# Altium PCB BMS Slave.PcbDoc
Units mil, origin at the board's own origin, x right, y up, seen from the top; angles counter-clockwise.
Board outline 4845 x 2615 mil, 2 copper layers (Top Layer, Bottom Layer); 134 components, 105 nets, 356 pads, 46 vias.
Unrouted connection lines stored in the file: 4.
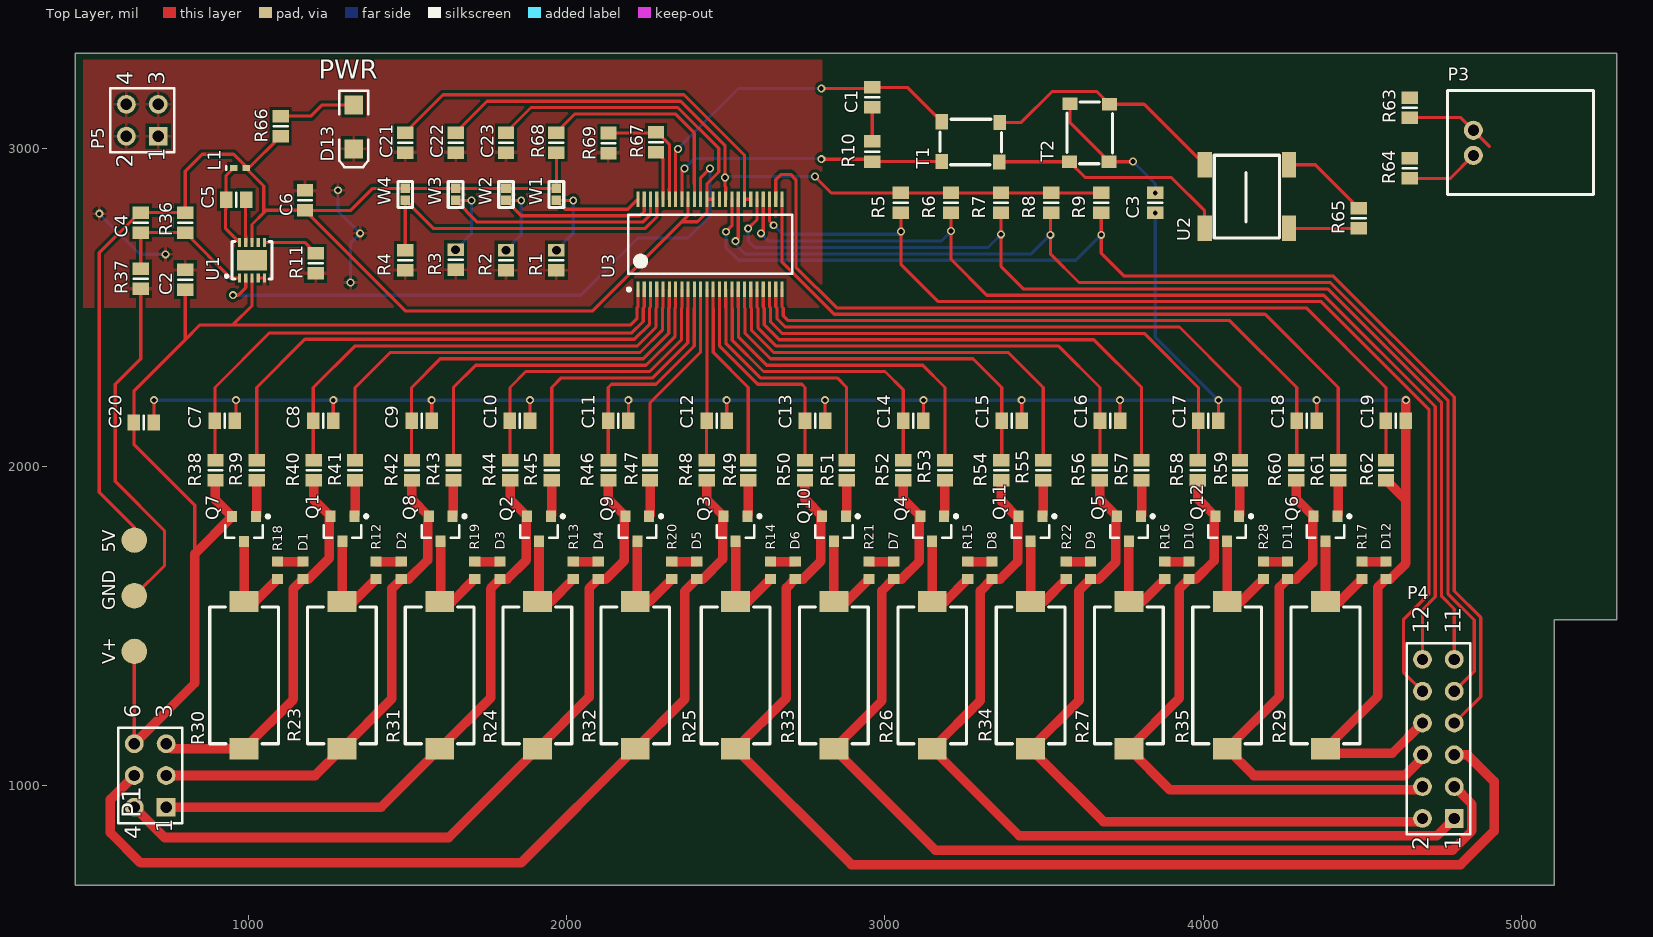
[diagram p0: Top Layer view]
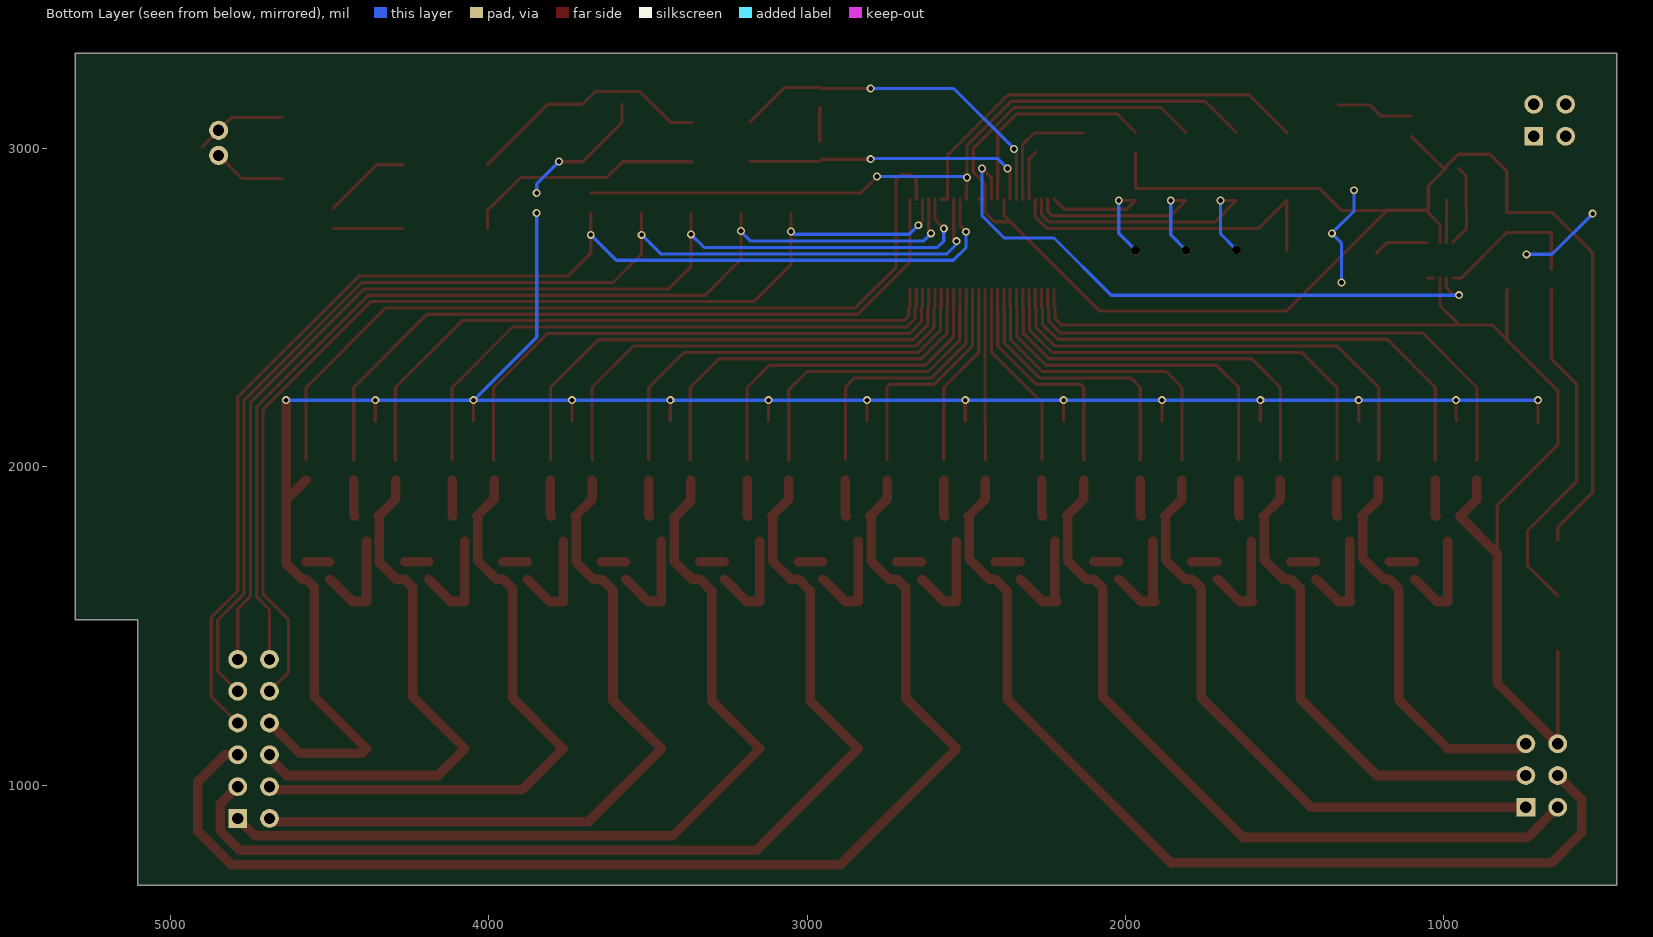
[diagram p1: Bottom Layer view, seen from below]

## Layer stack, top to bottom
Top Solder: solder mask 0.4, Solder Resist, Dk 3.5
Top Layer: signal copper 1.4
Dielectric 1: dielectric 12.6, FR-4, Dk 4.8
Bottom Layer: signal copper 1.4
Bottom Solder: solder mask 0.4, Solder Resist, Dk 3.5

## Board outline
455,685 455,3300 5300,3300 5300,1520 5105,1520 5105,685
cut-out: 455,685

## Design rules (kind name [scope] priority, off if disabled: settings)
Clearance [All] p1: gap=10 ignorepadtopadclearanceinfootprint=FALSE except(0: Arc-Hole Track-Hole SMDPad-Hole THPad-Hole Via-Hole Fill-Hole Poly-Hole Region-Hole Text-Hole)
PolygonConnect [All] p1: connectstyle=Relief reliefconductorwidth=10 reliefentries=4 polygonreliefangle="90 Angle" airgapwidth=10
RoutingVias [All] p1: holewidth=28 width=50 viastyle="Through Hole" minholewidth=28 minwidth=50 maxholewidth=28 maxwidth=50
SolderMaskExpansion [All] p1: expansion=4
Width [All] p1: maxlimit=30 minlimit=10 preferedwidth=10 bottomlayer_maxwidth=10 minimp=50.000000 maximp=50.000000 favimp=50.000000
30 further rules are at their usual default settings.

## Components (designator, comment, footprint, x,y, rotation, side; value= is the part's Value field where it differs from the comment)
5V "EXPOSED SOLDER PAD" "TEST PAD" 640,1770 r0 top
C1 "Cap" 6-0805_L 2960,3161.81 r90 top value=15pF
C2 "Cap" 6-0805_L 800,2588.5 r270 top value=2.2uF
C3 "Cap" 6-0805_L 3850,2830 r270 top value=10nF
C4 "Cap" 6-0805_L 660,2768.5 r90 top value=22pF
C5 "Cap" 6-0805_L 960,2840 r0 top value=2.2uF
C6 "Cap" 6-0805_L 1176.42,2837.99 r270 top value=2.2uF
C7 "Cap" 6-0805_L 925,2145 r180 top value=100pF
C8 "Cap" 6-0805_L 1234.18,2145 r180 top value=100pF
C9 "Cap" 6-0805_L 1543.35,2145 r180 top value=100pF
C10 "Cap" 6-0805_L 1852.53,2145 r180 top value=100pF
C11 "Cap" 6-0805_L 2161.71,2145 r180 top value=100pF
C12 "Cap" 6-0805_L 2470.88,2145 r180 top value=100pF
C13 "Cap" 6-0805_L 2780.06,2145 r180 top value=100pF
C14 "Cap" 6-0805_L 3089.24,2145 r180 top value=100pF
C15 "Cap" 6-0805_L 3398.41,2145 r180 top value=100pF
C16 "Cap" 6-0805_L 3707.59,2145 r180 top value=100pF
C17 "Cap" 6-0805_L 4016.77,2145 r180 top value=100pF
C18 "Cap" 6-0805_L 4325.94,2145 r180 top value=100pF
C19 "Cap" 6-0805_L 4606.5,2145 r180 top value=100pF
C20 "Cap" 6-0805_L 670,2140 r180 top value=100nF
C21 "Cap" 6-0805_L 1491.86,3020 r90 top value=100pF
C22 "Cap" 6-0805_L 1650.19,3020 r270 top value=1uF
C23 "Cap" 6-0805_L 1808.52,3020 r90 top value=1uF
D1 "LED2" 1608[0603] 1170,1675 r270 top
D2 "LED2" 1608[0603] 1479.55,1675 r270 top
D3 "LED2" 1608[0603] 1790,1675 r270 top
D4 "LED2" 1608[0603] 2098.64,1675 r270 top
D5 "LED2" 1608[0603] 2408.18,1675 r270 top
D6 "LED2" 1608[0603] 2717.73,1675 r270 top
D7 "LED2" 1608[0603] 3027.27,1675 r270 top
D8 "LED2" 1608[0603] 3336.82,1675 r270 top
D9 "LED2" 1608[0603] 3646.36,1675 r270 top
D10 "LED2" 1608[0603] 3955.91,1675 r270 top
D11 "LED2" 1608[0603] 4265.45,1675 r270 top
D12 "LED2" 1608[0603] 4575,1675 r270 top
D13 "LED2" 3.2X1.6X1.1 1330,3068.9 r270 top
GND "EXPOSED SOLDER PAD" "TEST PAD" 640,1595 r0 top
L1 "Inductor" 0402-A 971.81,2940 r0 top value=33uH
P1 "Header 6" HDR2X3_CEN 740,930 r90 top
P3 "Header 2" "MOLEX MICROCLASP 2POS RIGHT ANGLE" 4850,3058.5 r270 top
P4 "Header 12" HDR2X6 4790,895 r90 top
P5 "Header 4" HDR2X2 715,3040 r90 top
Q1 "PMOS-2" SOT23-3N 1294.09,1805.63 r270 top
Q2 "PMOS-2" SOT23-3N 1912.27,1805.63 r270 top
Q3 "PMOS-2" SOT23-3N 2530.45,1805.63 r270 top
Q4 "PMOS-2" SOT23-3N 3148.64,1805.63 r270 top
Q5 "PMOS-2" SOT23-3N 3766.82,1805.63 r270 top
Q6 "PMOS-2" SOT23-3N 4385,1805.63 r270 top
Q7 "PMOS-2" SOT23-3N 985,1805 r270 top
Q8 "PMOS-2" SOT23-3N 1603.18,1805.63 r270 top
Q9 "PMOS-2" SOT23-3N 2221.36,1805.63 r270 top
Q10 "PMOS-2" SOT23-3N 2839.55,1805.63 r270 top
Q11 "PMOS-2" SOT23-3N 3457.73,1805.63 r270 top
Q12 "PMOS-2" SOT23-3N 4075.91,1805.63 r270 top
R1 "Res1" 6-0805_L 1966.86,2650 r90 top value=3k
R2 "Res1" 6-0805_L 1808.52,2650 r90 top value=3k
R3 "Res1" 6-0805_L 1650.19,2651.5 r90 top value=3k
R4 "Res1" 6-0805_L 1491.86,2650 r90 top value=3k
R5 "Res1" 6-0805_L 3050,2830 r270 top value=10k
R6 "Res1" 6-0805_L 3207.5,2830 r270 top value=10k
R7 "Res1" 6-0805_L 3365,2830 r270 top value=10k
R8 "Res1" 6-0805_L 3522.5,2830 r270 top value=10k
R9 "Res1" 6-0805_L 3680,2830 r270 top value=10k
R10 "Res1" 6-0805_L 2960,2991.81 r90 top value=402
R11 "Res1" 6-0805_L 1210,2640 r90 top value=374k
R12 "Res1" 1608[0603] 1400,1675 r90 top value=1k
R13 "Res1" 1608[0603] 2020,1675 r270 top value=1k
R14 "Res1" 1608[0603] 2640,1675 r270 top value=1k
R15 "Res1" 1608[0603] 3260,1675 r270 top value=1k
R16 "Res1" 1608[0603] 3880,1675 r270 top value=1k
R17 "Res1" 1608[0603] 4500,1675 r270 top value=1k
R18 "Res1" 1608[0603] 1090,1675 r270 top value=1k
R19 "Res1" 1608[0603] 1710,1675 r270 top value=1k
R20 "Res1" 1608[0603] 2330,1675 r270 top value=1k
R21 "Res1" 1608[0603] 2950,1675 r270 top value=1k
R22 "Res1" 1608[0603] 3570,1675 r270 top value=1k
R23 "Res1" RES_4122 1292.5,1140 r180 top value=33
R24 "Res1" RES_4122 1907.5,1140 r180 top value=33
R25 "Res1" RES_4122 2530.45,1140 r180 top value=33
R26 "Res1" RES_4122 3148.64,1140 r180 top value=33
R27 "Res1" RES_4122 3766.82,1140 r180 top value=33
R28 "Res1" 1608[0603] 4190,1675 r270 top value=1k
R29 "Res1" RES_4122 4385,1140 r180 top value=33
R30 "Res1" RES_4122 985,1140 r180 top value=33
R31 "Res1" RES_4122 1600,1140 r180 top value=33
R32 "Res1" RES_4122 2215,1140 r180 top value=33
R33 "Res1" RES_4122 2839.55,1140 r180 top value=33
R34 "Res1" RES_4122 3457.73,1140 r180 top value=33
R35 "Res1" RES_4122 4075.91,1140 r180 top value=33
R36 "Res1" 6-0805_L 800,2768.5 r90 top value=1M
R37 "Res1" 6-0805_L 660,2591.5 r90 top value=316k
R38 "Res1" 6-0805_L 895,1990 r270 top value=100
R39 "Res1" 6-0805_L 1025,1990 r270 top value=3.3k
R40 "Res1" 6-0805_L 1203.88,1990 r270 top value=100
R41 "Res1" 6-0805_L 1334.09,1990 r270 top value=3.3k
R42 "Res1" 6-0805_L 1512.76,1990 r270 top value=100
R43 "Res1" 6-0805_L 1643.18,1990 r270 top value=3.3k
R44 "Res1" 6-0805_L 1821.64,1990 r270 top value=100
R45 "Res1" 6-0805_L 1952.27,1990 r270 top value=3.3k
R46 "Res1" 6-0805_L 2130.52,1990 r270 top value=100
R47 "Res1" 6-0805_L 2261.36,1990 r270 top value=3.3k
R48 "Res1" 6-0805_L 2439.4,1990 r270 top value=100
R49 "Res1" 6-0805_L 2570.45,1990 r270 top value=3.3k
R50 "Res1" 6-0805_L 2748.28,1990 r270 top value=100
R51 "Res1" 6-0805_L 2879.55,1990 r270 top value=3.3k
R52 "Res1" 6-0805_L 3057.16,1990 r270 top value=100
R53 "Res1" 6-0805_L 3188.64,1990 r270 top value=3.3k
R54 "Res1" 6-0805_L 3366.04,1990 r270 top value=100
R55 "Res1" 6-0805_L 3497.73,1990 r270 top value=3.3k
R56 "Res1" 6-0805_L 3674.92,1990 r270 top value=100
R57 "Res1" 6-0805_L 3806.82,1990 r270 top value=3.3k
R58 "Res1" 6-0805_L 3983.8,1990 r270 top value=100
R59 "Res1" 6-0805_L 4115.91,1990 r270 top value=3.3k
R60 "Res1" 6-0805_L 4292.68,1990 r270 top value=100
R61 "Res1" 6-0805_L 4425,1990 r270 top value=3.3k
R62 "Res1" 6-0805_L 4575,1990 r270 top value=100
R63 "Res1" 6-0805_L 4650,3130 r90 top value=22
R64 "Res1" 6-0805_L 4650,2938.5 r90 top value=22
R65 "Res1" 6-0805_L 4490,2781.5 r90 top value=100
R66 "Res1" 6-0805_L 1100,3071.5 r90 top value=1M
R67 "Res1" 6-0805_L 2280,3021.5 r90 top value=1.5k
R68 "Res1" 6-0805_L 1966.86,3020 r270 top value=1M
R69 "Res1" 6-0805_L 2130.52,3018.5 r270 top value=499
T1 "DLW43SH101XK2L" DLW43SH101XK2L 3218.64,2972.32 r90 top
T2 "DLW43SH101XK2L" DLW43SH101XK2L 3693,2999.32 r180 top
U1 "LT3990" LT3990 1010,2650 r0 top
U2 "PE68386" PE68386 4005,2950 r0 top
U3 "LTC6811-2" SSOP50P780X200-48N 2450,2700 r90 top
V+ "EXPOSED SOLDER PAD" "TEST PAD" 640,1420 r0 top
W1 "Jumper" jumper 1964.86,2837.99 r180 top
W2 "Jumper" jumper 1806.52,2837.99 r180 top
W3 "Jumper" jumper 1648.19,2837.99 r180 top
W4 "Jumper" jumper 1489.86,2837.99 r180 top

## Footprints (in the part's own frame and the unit in brackets; to place one, negate y for a bottom-side part, rotate by r counter-clockwise, add the part's x,y. Pads: shape width x height; smd on the part's side, far side on the other; paste and mask are expansions set on the pad)
3.2X1.6X1.1 [mm] "SMT LED; 2 Flat Leads"
  rect 1.5x1.5 smd: 1(-1.75,0) 2(1.75,0)
  silkscreen extent -2.9,-1.15 3.2,1.15
6-0805_L [mm] "Chip Resistor, Body 2.0x1.2mm, IPC High Density"
  rect 1x1.3 smd: 1(-0.8,0) 2(0.8,0)
  silkscreen extent 0,-0.55 0,0.55, body extent -1.07,-0.7 1.07,0.7, height 0.7
0402-A [mm] "Chip Inductor, Body 1.0x0.5mm, IPC High Density"
  rect 0.6x0.5 smd: 1(-0.5,0) 2(0.5,0)
  silkscreen extent -1.1,-0.15 -1.1,0.15, body extent -0.55,-0.3 0.55,0.3, height 0.55
1608[0603] [mm] "Chip Capacitor, Body 1.6x0.8mm, IPC High Density"
  rect 0.8x0.9 smd: 1(-0.7,0) 2(0.7,0)
  body extent -0.87,-0.48 0.87,0.48, height 1.3
DLW43SH101XK2L [mil] "100uH CMC"
  rect 47.24x39.37 smd: 1(-12,40) 2(-13,-141) 3(111,-142) 4(113,40)
  silkscreen extent -22,-148 121,46, body extent -17,-144 117,42, height 110
HDR2X2 [mm] "Connector; Header; 2x2 Position"
  rect 1.5x1.5 hole 0.9: 1(0,0)
  round 1.5 hole 0.9: 2(0,2.54) 3(2.54,0) 4(2.54,2.54)
  silkscreen extent -1.27,-1.27 3.81,3.81
HDR2X3_CEN [mm] "Connector; Header; 3x2 Position"
  rect 1.5x1.5 hole 0.9: 1(0,0)
  round 1.5 hole 0.9: 2(2.54,0) 3(5.08,0) 4(0,2.54) 5(2.54,2.54) 6(5.08,2.54)
  silkscreen extent -1.27,-1.27 6.35,3.81
HDR2X6 [mm] "Connector; Header; 6x2 Position"
  rect 1.5x1.5 hole 0.9: 1(0,0)
  round 1.5 hole 0.9: 2(0,2.54) 3(2.54,0) 4(2.54,2.54) 5(5.08,0) 6(5.08,2.54) 7(7.62,0) 8(7.62,2.54) 9(10.16,0) 10(10.16,2.54) 11(12.7,0) 12(12.7,2.54)
  silkscreen extent -1.27,-1.27 13.97,3.81
jumper [mil]
  rect 30x30 smd: 1(-2,0) 2(-2,-38)
  silkscreen extent -25,-60 21,22
LT3990 [mm] "62V, 350mA Step-Down Regulator"
  rect 0.25x0.7 smd: 1(-1,-1.425) 2(-0.5,-1.425) 3(0,-1.425) 4(0.5,-1.425) 5(1,-1.425) 6(-1,1.425) 7(-0.5,1.425) 8(0,1.425) 9(0.5,1.425) 10(1,1.425)
  rect 2.38x1.65 smd: GND(0,0)
  silkscreen extent -2.12,-1.5 1.6,1.5
"MOLEX MICROCLASP 2POS RIGHT ANGLE" [mil]
  round 60 hole 35: 1(0,0) 2(79,0)
  silkscreen extent -125,-81 202,378, body extent -118,-73 197,389, height 264
PE68386 [mil] "1:1 isolation transformer"
  rect 45x80 smd: 1(0,0) 2(0,-200) 3(265,-200) 4(265,0)
  round 20 on Top Overlay: 6(60,-30) 6(205,-30)
  silkscreen extent 30,-230 235,30
RES_4122 [mm]
  rect 2.3x1.7 smd: 1(0,0.66) 2(0,-11.1)
  silkscreen extent -2.74,-10.67 2.74,0.25, body extent -2.75,-10.47 2.75,0.15, height 4.8
SOT23-3N [mm] "DMG2305UX"
  rect 0.9x0.8 smd: 1(-1,0.95) 2(1,0) 3(-1,-0.95)
  silkscreen extent -1.12,-1.5 0.7,2.03, body extent -1.25,-1.5 1.25,1.5, height 1.1
SSOP50P780X200-48N [mm] "SSOP, 48-Leads, Body 12.80x5.25mm, Pitch 0.50mm, IPC Medium Density"
  rect 1.25x0.25 smd: 1(-3.6,5.75) 2(-3.6,5.25) 3(-3.6,4.75) 4(-3.6,4.25) 5(-3.6,3.75) 6(-3.6,3.25) 7(-3.6,2.75) 8(-3.6,2.25) 9(-3.6,1.75) 10(-3.6,1.25) 11(-3.6,0.75) 12(-3.6,0.25) 13(-3.6,-0.25) 14(-3.6,-0.75) 15(-3.6,-1.25) 16(-3.6,-1.75) 17(-3.6,-2.25) 18(-3.6,-2.75) 19(-3.6,-3.25) 20(-3.6,-3.75) 21(-3.6,-4.25) 22(-3.6,-4.75) 23(-3.6,-5.25) 24(-3.6,-5.75) 25(3.6,-5.75) 26(3.6,-5.25) 27(3.6,-4.75) 28(3.6,-4.25) 29(3.6,-3.75) 30(3.6,-3.25) 31(3.6,-2.75) 32(3.6,-2.25) 33(3.6,-1.75) 34(3.6,-1.25) 35(3.6,-0.75) 36(3.6,-0.25) 37(3.6,0.25) 38(3.6,0.75) 39(3.6,1.25) 40(3.6,1.75) 41(3.6,2.25) 42(3.6,2.75) 43(3.6,3.25) 44(3.6,3.75) 45(3.6,4.25) 46(3.6,4.75) 47(3.6,5.25) 48(3.6,5.75)
  silkscreen extent -3.72,-6.55 2.35,6.6, body extent -3.9,-6.55 3.9,6.55, height 2
"TEST PAD" [mil]
  round 80 smd: 1(0,0)

## Part data
5V GND V+: "testing point"
C1 C2 C3 C4 C5 C6 C7 C8 C9 C10 C11 C12 C13 C14 C15 C16 C17 C18 C19 C20 C21 C22 C23: "Capacitor", LatestRevisionDate=17-Jul-2002, LatestRevisionNote="Re-released for DXP Platform.", PackageDescription="Radial Cap, Thru-Hole; 2 Leads; 0.3 in Pin Spacing", PackageReference=RAD-0.3, Published=8-Jun-2000, Publisher="Altium Limited"
D1 D2 D3 D4 D5 D6 D7 D8 D9 D10 D11 D12 D13: "Typical RED, GREEN, YELLOW, AMBER GaAs LED", LatestRevisionDate=17-Jul-2002, LatestRevisionNote="Re-released for DXP Platform.", PackageDescription="SM LED; 2 Flat Leads", PackageReference=3.2X1.6X1.1, PackageVersion=Feb-2002, Published=8-Jun-2000, Publisher="Altium Limited"
P1: "Header, 6-Pin", LatestRevisionDate=17-Jul-2002, LatestRevisionNote="Re-released for DXP Platform.", Publisher="Altium Limited"
P3: "Header, 2-Pin", LatestRevisionDate=17-Jul-2002, LatestRevisionNote="Re-released for DXP Platform.", Publisher="Altium Limited"
P4: "Header, 12-Pin", LatestRevisionDate=17-Jul-2002, LatestRevisionNote="Re-released for DXP Platform.", Publisher="Altium Limited"
P5: "Header, 4-Pin", LatestRevisionDate=17-Jul-2002, LatestRevisionNote="Re-released for DXP Platform.", Publisher="Altium Limited"
Q1 Q2 Q3 Q4 Q5 Q6 Q7 Q8 Q9 Q10 Q11 Q12: "P-Channel Power MOSFET BSS308PE", ComponentLink1Description="Manufacturer Link", ComponentLink1URL=http://www.irf.com/, DatasheetVersion=PD-9.390D, LatestRevisionDate=17-Jul-2002, LatestRevisionNote="Re-released for DXP Platform.", Note="Pin 4 not drawn and electrically connected to Pin 2.", PackageDescription="TO, Thru-Hole, Vertical, Heatsink Mounted; 3 In-Line Leads; Pitch 2.54 mm", PackageReference=TO-220AB, PackageVersion=Feb-1997, Published=8-Jun-2000, Publisher="Altium Limited"
R1 R2 R3 R4 R5 R6 R7 R8 R9 R10 R11 R12 R13 R14 R15 R16 R17 R18 R19 R20 R21 R22 R23 R24 R25 R26 R27 R28 R29 R30 R31 R32 R33 R34 R35 R36 R37 R38 R39 R40 R41 R42 R43 R44 R45 R46 R47 R48 R49 R50 R51 R52 R53 R54 R55 R56 R57 R58 R59 R60 R61 R62 R63 R64 R65 R66 R67 R68 R69: "Resistor", LatestRevisionDate=17-Jul-2002, LatestRevisionNote="Re-released for DXP Platform.", PackageDescription="Axial Device, Thru-Hole; 2 Leads; 0.3 in Pin Spacing", PackageReference=AXIAL-0.3, Published=8-Jun-2000, Publisher="Altium Limited"
T1 T2: "100uH CMC"
U1: "LT3990 62V, 350mA Step-Down Regulator", Mfr 1="Linear Technologies", Mfr 1 PN=LT3990
U2: "1:1 isolation transformer"
U3: "12-cell battery management chip"
W1 W2 W3 W4: "Jumper Wire", LatestRevisionDate=17-Jul-2002, LatestRevisionNote="Re-released for DXP Platform.", PackageDescription="Radial Cap, Thru-Hole; 2 Leads; 0.2 in Pin Spacing", PackageReference=RAD-0.2, Published=24-Mar-1999, Publisher="Altium Limited"
L1: Code_IEC=1005, Code_JEITA=0402, LatestRevisionDate=29-May-2009, LatestRevisionNote="IPC-7351 Footprint Added.", PackageDescription="Chip Inductor", PackageReference=0402-A, Published=8-Jun-2000, Publisher="Altium Limited"

## Via types
v1: diameter 25, hole 15, Top Layer to Bottom Layer, 43 vias
v2: diameter 28, hole 28, Top Layer to Bottom Layer, 3 vias

## Nets (pads, with @x,y where several pads share a name; then routed paths per layer and width w, separated by ;. In a path a pad name is that pad's centre, name@x,y a point inside that pad or via, vN(x,y) a via of type N, cw(c..) or ccw(c..) an arc to the next point about the centre after c; other vN are vias at no path point)
0-5V: 5V.1 C4.2 C6.2 C23.2 L1.2 R36.2 R66.1 R68.2 U1.8 U3.36 U3.37 U3.40 W1.2 W2.2 W3.2 W4.2 | length 5715.3
  Top Layer w10: 5V.1 640,1810 530,1920 530,2673.5 656.5,2800 C4.2 R36.2 800,2930 852.99,2982.99 952,2982.99 991.5,2943.5 L1.2 ; U1.8 1010,2762.32 1046.65,2798.98 ; R66.1 1000,2940 L1.2 ; C6.2@1176.42,2807.01 1054.69,2807.01 1046.65,2798.98 ; C23.2 1887.03,3130 2349.07,3130 2477.5,3001.57 2477.5,2927.22 2440.47,2890.19 U3.37@2440.47,2841.73 ; R68.2 W1.2 W2.2 W3.2 W4.2 1390,2875.99 1320.5,2806.5 C6.2 1492.92,2490 2080,2490 2360.71,2770.71 ; U3.40 2381.1,2791.1 2360.71,2770.71 ; U3.36 U3.37@2440.47,2841.73 ; L1.2 991.5,2938.5 1046.65,2883.35 1046.65,2798.98 ; 2360.71,2770.71 2410.71,2770.71 2440.16,2800.16 U3.37 U3.37@2440.47,2841.73
0-A0: R4.2 U3.45 W4.1 | length 1054.9
  Top Layer w10: R4.2 W4.1 1579.85,2750 2246.57,2750 2283.31,2786.74 2283.31,2803.31 2282.68,2803.94 U3.45
0-A1: R3.2 U3.46 W3.1 | length 923.9
  Top Layer w10: v1(1700,2837.99) W3.1 1718.18,2770 2238.28,2770 2263.31,2795.02 2262.99,2795.34 U3.46
  Bottom Layer w10: v2(1650.19,2682.99) 1700,2732.8 v1(1700,2837.99)
0-A2: R2.2 U3.47 W2.1 | length 723
  Top Layer w10: v1(1856.52,2837.99) W2.1 1856.52,2790 2230,2790 2243.31,2803.31 U3.47
  Bottom Layer w10: v2(1808.52,2681.5) 1856.52,2729.49 v1(1856.52,2837.99)
0-A3: R1.2 U3.48 W1.1 | length 513
  Top Layer w10: v1(2020,2837.99) W1.1 1994.85,2810 2191.65,2810 U3.48@2223.31,2841.65 ; U3.48@2223.31,2841.73 U3.48@2223.31,2841.65 ; U3.48@2223.39,2841.73 U3.48@2223.31,2841.65
  Bottom Layer w10: v2(1966.86,2681.5) 2020,2734.64 v1(2020,2837.99)
0-EN: U1.2 U3.38 | length 1941.3
  Top Layer w10: v1(950,2540) 966.38,2540 990,2563.62 990,2563.94 ; 990.32,2563.94 U1.2 ; U3.38 2420.47,2909.08 v1(2450,2938.61)
  Bottom Layer w10: v1(950,2540) 2043.62,2540 2223.62,2720 2380,2720 2450,2790 v1(2450,2938.61)
0-GND: C2.1 C3.2 C6.1 C7.1 C8.1 C9.1 C10.1 C11.1 C12.1 C13.1 C14.1 C15.1 C16.1 C17.1 C18.1 C19.1 C20.1 C21.1 C22.2 C23.1 D12.2 D13.2 GND.1 P4.8 P5.1 P5.2 P5.3 P5.4 R1.1 R2.1 R3.1 R4.1 R11.1 R29.1 R37.1 R62.2 R69.2 U1.4 U1.5 | length 8820.6
  Top Layer w10: GND.1 735,1690 735,1800 580,1955 580,2260 660,2340 R37.1 ; C20.1 v1(701.5,2210) ; C7.1 960,2148.5 v1(960,2210) ; U1.4 U1.5 ; C8.1 v1(1265.67,2210) ; C9.1 v1(1574.85,2210) ; C10.1 v1(1884.03,2210) ; C11.1 v1(2193.2,2210) ; C12.1 v1(2502.38,2210) ; C13.1 v1(2811.56,2210) ; C14.1 v1(3120.73,2210) ; C15.1 v1(3429.91,2210) ; C16.1 v1(3739.09,2210) ; C17.1 v1(4048.26,2210) ; C18.1 v1(4357.44,2210)
  Top Layer w30: R62.2 4637.99,1895.51 ; v1(4637.99,2210) C19.1 4637.99,1895.51 ; P4.8 4595,1100 4399,1100 R29.1 4550,1279 4550,1622.44 D12.2 4588.7,1647.44 4637.99,1696.73 4637.99,1895.51
  Bottom Layer w10: v1(530,2796.45) 657.95,2668.5 v1(738.19,2668.5) ; v1(701.5,2210) v1(960,2210) v1(1265.67,2210) v1(1574.85,2210) v1(1884.03,2210) v1(2193.2,2210) v1(2502.38,2210) v1(2811.56,2210) v1(3120.73,2210) v1(3429.91,2210) v1(3739.09,2210) v1(4048.26,2210) ; v1(1280,2870) 1280,2804.64 v1(1350,2734.64) 1320,2704.64 v1(1320,2580) ; v1(3850,2798.5) 3850,2408.26 v1(4048.26,2210) ; v1(4637.99,2210) v1(4357.44,2210) v1(4048.26,2210)
0-IMA: R10.1 T1.1 U3.41 | length 925.1
  Top Layer w10: U3.41 2361.42,2930.03 v1(2370,2938.61) ; v1(2800,2967.64) 2952.68,2967.64 R10.1 T1.1
  Bottom Layer w10: v1(2370,2938.61) 2401.39,2970 v1@2800,2970
0-IPA: C1.2 T1.4 U3.42 | length 1115.7
  Top Layer w10: U3.42 2341.73,2992.66 v1(2349.07,3000) ; v1(2800,3190) 2956.69,3190 C1.2 3070.64,3193.31 T1.4
  Bottom Layer w10: v1(2349.07,3000) 2539.07,3190 v1(2800,3190)
0-TEMP1: P4.10 R5.2 U3.27 | length 3456.7
  Top Layer w10: U3.27 2637.01,2772.99 v1(2650,2760) ; R5.2 v1(3050,2740) 3050,2637.89 3167.89,2520 4371.72,2520 4710,2181.72 4710,1600 4630,1520 4630,1355 P4.10
  Bottom Layer w10: v1(2650,2760) 2678.5,2731.5 3041.5,2731.5 v1(3050,2740)
0-TEMP2: P4.12 R6.2 U3.28 | length 3403.9
  Top Layer w10: v1(2610,2734.64) 2617.32,2741.96 U3.28 ; R6.2 v1(3207.5,2741.96) 3207.5,2652.5 3320,2540 4380,2540 4730,2190 4730,1591.72 4690,1551.72 P4.12
  Bottom Layer w10: v1(2610,2734.64) 2634.64,2710 3177.5,2710 3207.5,2740 v1(3207.5,2741.96)
0-TEMP3: P4.11 R7.2 U3.29 | length 3517.8
  Top Layer w10: v1(2570,2750) 2597.64,2777.64 U3.29 ; R7.2 v1(3365,2731.5) 3365,2630 3435,2560 4391.72,2560 4750,2201.72 4750,1593.43 4790,1553.43 P4.11
  Bottom Layer w10: v1(2570,2750) 2570,2710 2590,2690 3323.5,2690 v1(3365,2731.5)
0-TEMP4: P4.9 R8.2 U3.32 | length 3718.1
  Top Layer w10: v1(2530,2710) 2538.58,2718.58 U3.32 ; R8.2 3520,2796 v1(3520,2730) 3520,2670 3610,2580 4400,2580 4770,2210 4770,1601.72 4852.97,1518.74 4852.97,1357.97 P4.9
  Bottom Layer w10: v1(2530,2710) 2530,2700 2560,2670 3460,2670 v1(3520,2730)
0-TEMP5: P4.7 R9.2 U3.33 | length 3906.4
  Top Layer w10: v1(2500,2739.49) 2518.9,2758.39 U3.33 ; R9.2 v1(3680,2730) 3680,2672.5 3752.5,2600 4410,2600 4790,2220 4790,1610 4872.97,1527.03 4872.97,1277.97 P4.7
  Bottom Layer w10: v1(2500,2739.49) 2500,2690 2540,2650 3600,2650 v1(3680,2730)
0-V+: C2.2 C20.2 P1.6 Q7.3 R38.2 U1.3 U3.1 V+.1 | length 3957.6
  Top Layer w10: P1.6 V+.1 ; C2.2 800,2400 ; 830,1726.77 830,1880 638.5,2071.5 C20.2 638.5,2238.5 800,2400 ; U1.3 1010,2506.57 950,2446.57 ; U3.1 2223.62,2503.95 2220,2500.33 2220,2465.78 2200.79,2446.57 950,2446.57 ; 800,2400 846.57,2446.57 950,2446.57
  Top Layer w30: P1.6 830,1320 830,1726.77 Q7.3 895,1896.97 R38.2
0-VTEMP: C22.1 R5.1 R6.1 R7.1 R8.1 R9.1 U3.34 | length 2320.1
  Top Layer w10: C22.1 1748.69,3150 2357.36,3150 2497.5,3009.86 v1(2497.5,2910) 2497.5,2881.71 2499.21,2880 U3.34 ; v1(2780,2912.99) 2831.5,2861.5 R5.1 R6.1 R7.1 R8.1 R9.1
  Bottom Layer w10: v1(2497.5,2910) 2500.49,2912.99 v1(2780,2912.99)
NetC1_1: C1.1 R10.2 | length 107
  Top Layer w10: R10.2 C1.1
NetC3_1: C3.1 T2.1 T2.3 | length 435.7
  Top Layer w10: T2.3 3582,3082.32 T2.1 3779.32,2959.32 v1(3780,2960)
  Bottom Layer w10: v1(3780,2960) 3850,2890 v1(3850,2861.5)
NetC4_1: C4.1 R36.1 R37.2 U1.1 | length 483.7
  Top Layer w10: R37.2 C4.1 R36.1 943.11,2593.9 U1.1@970.39,2593.9
NetC5_1: C5.1 L1.1 U1.6 | length 262.3
  Top Layer w10: L1.1 928.5,2916.38 C5.1 928.5,2811.5 927.01,2810 927.01,2749.49 U1.6@970.39,2706.1
NetC5_2: C5.2 U1.7 | length 134
  Top Layer w10: C5.2@990,2840 990,2726.65 990.32,2726.33 U1.7
NetC7_2: C7.2 R38.1 U3.2 | length 1763.7
  Top Layer w10: R38.1 893.5,2022.99 C7.2 893.5,2250 1064.92,2421.42 2203.92,2421.42 2240,2457.5 2240,2499.55 2243.31,2502.85 U3.2
NetC8_2: C8.2 R40.1 U3.4 | length 1504.6
  Top Layer w10: R40.1 1202.68,2022.7 C8.2 1202.68,2250 1332.68,2380 2220.29,2380 2280.16,2439.86 2280.16,2499.55 2282.68,2502.07 U3.4
NetC9_2: C9.2 R42.1 U3.6 | length 1246.6
  Top Layer w10: R42.1 1511.86,2022.4 C9.2 1511.86,2250 1601.86,2340 2240,2340 2320.16,2420.16 2320.16,2499.55 2322.05,2501.44 U3.6
NetC10_2: C10.2 R44.1 U3.8 | length 988.7
  Top Layer w10: R44.1 1821.03,2022.1 C10.2 1821.03,2250 1871.03,2300 2260,2300 2360.16,2400.16 2360.16,2499.55 2361.42,2500.81 U3.8
NetC11_2: C11.2 R46.1 U3.10 | length 730.9
  Top Layer w10: R46.1 2130.21,2021.8 C11.2 2130.21,2250 2140.21,2260 2280,2260 2400.16,2380.16 2400.16,2500 2400.79,2500.63 U3.10
NetC12_2: C12.2 R48.1 U3.12 | length 537.1
  Top Layer w10: R48.1 C12.2 2440.16,2145.77 U3.12
NetC13_2: C13.2 R50.1 U3.14 | length 729.5
  Top Layer w10: U3.14 2479.53,2500.47 2480,2500 2480,2380 2600,2260 2738.56,2260 2748.56,2250 C13.2 2748.56,2021.78 R50.1
NetC14_2: C14.2 R52.1 U3.16 | length 983.9
  Top Layer w10: U3.16 2518.9,2500.65 2520,2499.55 2520,2398.13 2618.13,2300 3000,2300 3057.74,2242.26 C14.2 3057.74,2022.08 R52.1
NetC15_2: C15.2 R54.1 U3.18 | length 1245.2
  Top Layer w10: U3.18 2558.27,2501.28 2560,2499.55 2560,2420 2640,2340 3276.92,2340 3366.92,2250 C15.2 3366.92,2022.38 R54.1
NetC16_2: C16.2 R56.1 U3.20 | length 1503.8
  Top Layer w10: U3.20 2597.64,2502.36 2600.45,2499.55 2600.45,2438.28 2658.74,2380 3546.09,2380 3676.09,2250 C16.2 3676.09,2022.67 R56.1
NetC17_2: C17.2 R58.1 U3.22 | length 1763.1
  Top Layer w10: U3.22 2637.01,2503.45 2640.45,2500 2640.45,2455.78 2676.24,2420 3815.27,2420 3985.27,2250 C17.2 3985.27,2022.97 R58.1
NetC18_2: C18.2 R60.1 U3.24 | length 2020.9
  Top Layer w10: U3.24 2676.38,2503.62 2680.45,2499.55 2680.45,2475.78 2696.24,2460 4084.45,2460 4294.45,2250 C18.2 4294.45,2023.27 R60.1
NetC19_2: C19.2 R62.1 U3.26 | length 2654
  Top Layer w10: U3.26 2656.69,2903.39 2673.31,2920 2703.39,2920 2720,2903.39 2720,2628.28 2848.28,2500 4325,2500 4575,2250 C19.2 R62.1
NetC21_2: C21.2 U3.30 U3.31 | length 1352.2
  Top Layer w10: C21.2 1610.36,3170 2368.27,3170 2558.5,2979.76 U3.31@2558.5,2841.73 ; U3.31 U3.31@2558.5,2841.73 ; U3.30 U3.31@2558.5,2841.73
NetD1_1: D1.1 R18.1 | length 80
  Top Layer w30: R18.1 D1.1
NetD1_2: D1.2 P1.3 Q1.3 R30.1 R40.2 | length 1240.8
  Top Layer w30: P1.3 756,1114 R30.1 1140,1269 1140,1617.44 D1.2 1187.44,1647.44 1253.34,1713.34 1253.34,1841.65 Q1.3 1203.88,1897.81 R40.2
NetD2_1: D2.1 R12.2 | length 79.5
  Top Layer w30: R12.2 D2.1
NetD2_2: D2.2 P1.2 Q8.3 R23.1 R42.2 | length 1580.4
  Top Layer w30: P1.2 1208.5,1030 R23.1 1450,1271.5 1450,1617.9 D2.2 1502.44,1647.44 1562.43,1707.43 1562.43,1841.65 Q8.3 1512.76,1898.02 R42.2
NetD3_1: D3.1 R19.1 | length 80
  Top Layer w30: R19.1 D3.1
NetD3_2: D3.2 P1.1 Q2.3 R31.1 R44.2 | length 1929.8
  Top Layer w30: P1.1 1416,930 R31.1 1760,1274 1760,1617.44 D3.2 1812.44,1647.44 1871.52,1706.52 1871.52,1841.65 Q2.3 1821.64,1898.23 R44.2
NetD4_1: D4.1 R13.1 | length 78.6
  Top Layer w30: R13.1 D4.1
NetD4_2: D4.2 P1.4 Q9.3 R24.1 R46.2 | length 2417.5
  Top Layer w30: P1.4 735,835 1628.5,835 R24.1 2070,1276.5 2070,1618.8 D4.2 2122.44,1647.44 2180.62,1705.62 2180.62,1841.65 Q9.3 2130.52,1898.44 R46.2
NetD5_1: D5.1 R20.1 | length 78.2
  Top Layer w30: R20.1 D5.1
NetD5_2: D5.2 P1.5 Q3.3 R32.1 R48.2 | length 3042.3
  Top Layer w30: P1.5 565,955 565,850 660,755 1856,755 R32.1 2370,1269 2370,1609.26 D5.2 2427.44,1647.44 2489.71,1709.71 2489.71,1841.65 Q3.3 2439.4,1898.65 R48.2
NetD6_1: D6.1 R14.1 | length 77.7
  Top Layer w30: R14.1 D6.1
NetD6_2: D6.2 P4.5 Q10.3 R25.1 R50.2 | length 3888.8
  Top Layer w30: R50.2 2748.28,1898.87 Q10.3 2798.8,1841.65 2798.8,1703.8 2742.44,1647.44 D6.2 2690,1619.71 2690,1273.55 R25.1 2894.45,750 4810,750 4915,855 4915,1011.57 4831.57,1095 P4.5
NetD7_1: D7.1 R21.1 | length 77.3
  Top Layer w30: R21.1 D7.1
NetD7_2: D7.2 P4.3 Q4.3 R33.1 R52.2 | length 3319.1
  Top Layer w30: R52.2 3057.16,1899.08 Q4.3 3107.89,1841.65 3107.89,1702.89 3052.44,1647.44 D7.2 2990,1610.17 2990,1264.45 R33.1 3158.55,795 4784.41,795 4845,855.59 4845,940 P4.3
NetD8_1: D8.1 R15.1 | length 76.8
  Top Layer w30: R15.1 D8.1
NetD8_2: D8.2 P4.1 Q11.3 R26.1 R54.2 | length 2769
  Top Layer w30: R54.2 3366.04,1892.6 3416.98,1841.65 3416.98,1701.98 3362.44,1647.44 D8.2 3300,1610.62 3300,1265.36 R26.1 3422.16,840.47 4735.47,840.47 P4.1
NetD9_1: D9.1 R22.1 | length 76.4
  Top Layer w30: R22.1 D9.1
NetD9_2: D9.2 P4.2 Q5.3 R34.1 R56.2 | length 2326.2
  Top Layer w30: R56.2 3674.92,1899.5 Q5.3 3726.07,1841.65 3726.07,1701.07 3672.44,1647.44 D9.2 3610,1611.08 3610,1266.27 R34.1 3686.73,885 4680,885 P4.2
NetD10_1: D10.1 R16.1 | length 75.9
  Top Layer w30: R16.1 D10.1
NetD10_2: D10.2 P4.4 Q12.3 R27.1 R58.2 | length 1973.1
  Top Layer w30: R58.2 3983.8,1899.71 Q12.3 4035.16,1841.65 4035.16,1705.16 3977.44,1647.44 D10.2 3925.91,1617.44 3925.91,1273.09 R27.1 3895.82,985 4680,985 P4.4
NetD11_1: D11.1 R28.1 | length 75.5
  Top Layer w30: R28.1 D11.1
NetD11_2: D11.2 P4.6 Q6.3 R35.1 R60.2 | length 1677.3
  Top Layer w30: R60.2 4292.68,1899.92 Q6.3 4344.25,1841.65 4344.25,1699.25 4292.44,1647.44 D11.2 4240,1621.99 4240,1278.09 R35.1 4159.91,1030 4635,1030 4690,1085 P4.6
NetD12_1: D12.1 R17.1 | length 75
  Top Layer w30: R17.1 D12.1
NetD13_1: D13.1 R66.2 | length 244.4
  Top Layer w10: R66.2 1194.6,3102.99 1229.4,3137.8 D13.1
NetP2_1: P3.1 R63.1 | length 287.3
  Top Layer w10: R63.1 4810,3098.5 P3.1 4900,3008.5
NetP2_2: P3.2 R64.1 | length 230
  Top Layer w10: R64.1 4777.5,2907.01 P3.2
NetQ1_1: Q1.1 R41.2 | length 114.6
  Top Layer w30: Q1.1 1334.09,1847.6 R41.2
NetQ1_2: Q1.2 R12.1 R23.2 | length 326.6
  Top Layer w30: Q1.2 1294.09,1578.59 R23.2 1329.56,1577 R12.1
NetQ2_1: Q2.1 R45.2 | length 114.6
  Top Layer w30: Q2.1 1952.27,1847.6 R45.2
NetQ2_2: Q2.2 R13.2 R24.2 | length 332.9
  Top Layer w30: Q2.2 1912.27,1581.77 R24.2 1949.56,1577 R13.2
NetQ3_1: Q3.1 R49.2 | length 114.6
  Top Layer w30: Q3.1 2570.45,1847.6 R49.2
NetQ3_2: Q3.2 R14.2 R25.2 | length 328
  Top Layer w30: Q3.2 R25.2 2569.56,1577 R14.2
NetQ4_1: Q4.1 R53.2 | length 114.6
  Top Layer w30: Q4.1 3188.64,1847.6 R53.2
NetQ4_2: Q4.2 R15.2 R26.2 | length 329.8
  Top Layer w30: Q4.2 R26.2 3189.56,1577 R15.2
NetQ5_1: Q5.1 R57.2 | length 114.6
  Top Layer w30: Q5.1 3806.82,1847.6 R57.2
NetQ5_2: Q5.2 R16.2 R27.2 | length 331.6
  Top Layer w30: Q5.2 R27.2 3809.56,1577 R16.2
NetQ6_1: Q6.1 R61.2 | length 114.6
  Top Layer w30: Q6.1 4425,1847.6 R61.2
NetQ6_2: Q6.2 R17.2 R29.2 | length 333.4
  Top Layer w30: Q6.2 R29.2 4429.56,1577 R17.2
NetQ7_1: Q7.1 R39.2 | length 115.2
  Top Layer w30: Q7.1 1025,1846.97 R39.2
NetQ7_2: Q7.2 R18.2 R30.2 | length 322.8
  Top Layer w30: Q7.2 R30.2 1019.56,1577 R18.2
NetQ8_1: Q8.1 R43.2 | length 114.6
  Top Layer w30: Q8.1 1643.18,1847.6 R43.2
NetQ8_2: Q8.2 R19.2 R31.2 | length 329.8
  Top Layer w30: Q8.2 1603.18,1580.18 R31.2 1639.56,1577 R19.2
NetQ9_1: Q9.1 R47.2 | length 114.6
  Top Layer w30: Q9.1 2261.36,1847.6 R47.2
NetQ9_2: Q9.2 R20.2 R32.2 | length 336.1
  Top Layer w30: Q9.2 2221.36,1583.36 R32.2 2259.56,1577 R20.2
NetQ10_1: Q10.1 R51.2 | length 114.6
  Top Layer w30: Q10.1 2879.55,1847.6 R51.2
NetQ10_2: Q10.2 R21.2 R33.2 | length 328.9
  Top Layer w30: Q10.2 R33.2 2879.56,1577 R21.2
NetQ11_1: Q11.1 R55.2 | length 114.6
  Top Layer w30: Q11.1 3497.73,1847.6 R55.2
NetQ11_2: Q11.2 R22.2 R34.2 | length 330.7
  Top Layer w30: Q11.2 R34.2 3499.56,1577 R22.2
NetQ12_1: Q12.1 R59.2 | length 114.6
  Top Layer w30: Q12.1 4115.91,1847.6 R59.2
NetQ12_2: Q12.2 R28.2 R35.2 | length 332.5
  Top Layer w30: Q12.2 R35.2 4119.56,1577 R28.2
NetR11_2: R11.2 U1.10 | length 175
  Top Layer w10: U1.10 1175.39,2706.1 R11.2
NetR39_1: R39.1 U3.3 | length 1656.3
  Top Layer w10: R39.1 1025,2250 1176.42,2401.42 2212.21,2401.42 2260,2449.21 2260,2499.7 2262.99,2502.7 U3.3
NetR41_1: R41.1 U3.5 | length 1398.2
  Top Layer w10: R41.1 1334.09,2250 1444.09,2360 2230,2360 2300.16,2430.16 2300.16,2499.55 2302.36,2501.75 U3.5
NetR43_1: R43.1 U3.7 | length 1139.7
  Top Layer w10: R43.1 1643.18,2250 1713.18,2320 2248.58,2320 2340.16,2411.58 2340.16,2499.55 2341.73,2501.12 U3.7
NetR45_1: R45.1 U3.9 | length 882.9
  Top Layer w10: R45.1 1952.27,2250 1982.27,2280 2270,2280 2380.16,2390.16 2380.16,2499.55 2381.1,2500.49 U3.9
NetR47_1: R47.1 U3.11 | length 602.7
  Top Layer w10: R47.1 2261.36,2201.36 2420.16,2360.16 2420.16,2500 2420.47,2500.32 U3.11
NetR49_1: R49.1 U3.13 | length 582.6
  Top Layer w10: U3.13 2459.84,2499.7 2460,2499.55 2460,2360.45 2570.45,2250 R49.1
NetR51_1: R51.1 U3.15 | length 835.5
  Top Layer w10: U3.15 2499.21,2500.33 2500,2499.55 2500,2388.44 2608.44,2280 2849.55,2280 2879.55,2250 R51.1
NetR53_1: R53.1 U3.17 | length 1093.6
  Top Layer w10: U3.17 2538.58,2500.96 2540,2499.55 2540,2407.81 2627.81,2320 3118.64,2320 3188.64,2250 R53.1
NetR55_1: R55.1 U3.19 | length 1349.6
  Top Layer w10: U3.19 2577.95,2502.05 2580.45,2499.55 2580.45,2430 2650.45,2360 3387.73,2360 3497.73,2250 R55.1
NetR57_1: R57.1 U3.21 | length 1609.3
  Top Layer w10: U3.21 2617.32,2502.68 2620.45,2499.55 2620.45,2446.57 2667.02,2400 3656.82,2400 3806.82,2250 R57.1
NetR59_1: R59.1 U3.23 | length 1867.6
  Top Layer w10: U3.23 2656.69,2503.76 2660.45,2500 2660.45,2465.47 2685.92,2440 3925.91,2440 4115.91,2250 R59.1
NetR61_1: R61.1 U3.25 | length 2338.2
  Top Layer w10: U3.25@2676.61,2841.73 2676.61,2643.39 2840,2480 4195,2480 4425,2250 R61.1
NetR63_2: R63.2 R65.2 U2.4 | length 276.8
  Top Layer w10: U2.4 4352.99,2950 R65.2
NetR64_2: R64.2 R65.1 U2.3 | length 220
  Top Layer w10: U2.3 R65.1
NetR67_1: R67.1 U3.44 | length 157.5
  Top Layer w10: R67.1 2302.36,2967.64 U3.44
NetR67_2: R67.2 R69.1 U3.43 | length 379.2
  Top Layer w10: R69.1 2286.49,3050 2322.36,3014.13 2322.36,2875.99 2322.05,2875.68 U3.43
NetR68_1: R68.1 U3.39 | length 691.3
  Top Layer w10: R68.1 2025.36,3110 2340.79,3110 2400.47,3050.32 2400.47,2890 2400.79,2889.68 U3.39
NetT1_2: T1.2 T2.4 U2.2 | length 764.3
  Top Layer w10: T1.2 T2.4 3629.32,2910 3900,2910 4005,2805 U2.2
NetT1_3: T1.3 T2.2 U2.1 | length 779.9
  Top Layer w10: T1.3 3429.09,3083.32 3526.09,3180.32 3666,3180.32 T2.2 3814.68,3140.32 U2.1
pads on no net: U1.9 U1.GND U2.6 U3.35

## Polygon pours and split planes (outlines as drawn)
0-GND on Top Layer "Top Layer-No Net" (solid, pour order 6): 480,2500 2802.14,2500 2802.14,3280 480,3280

## Silkscreen, mask and mechanical layers (free items; w line width, h text height)
Top Overlay:
  text "PWR" at 1220,3220 h60
Mechanical 1:
  lines w10: 455,685 455,3300 4365,3300 5300,3300 5300,1520 5105,1520 5105,685 455,685

## Dimensions
455,685 to 455,3300 on Mechanical 13
5105,685 to 455,685 on Mechanical 13
615,3140 to 455,3300 on Mechanical 13
615,3140 to 455,3300 on Mechanical 13
4790,895 to 5105,685 on Mechanical 13
4790,895 to 5105,685 on Mechanical 13
640,930 to 455,685 on Mechanical 13
640,930 to 455,685 on Mechanical 13

## Text inside footprints (layer, text, board x,y; h text height)
P1: Top Overlay "4" at 660,830 h50 r90; Top Overlay "1" at 760,850 h50 r90; Top Overlay "3" at 760,1210 h50 r90; Top Overlay "6" at 660,1210 h50 r90
P4: Top Overlay "12" at 4710,1475 h50 r90; Top Overlay "1" at 4810,1515 h50 r90; Top Overlay "1" at 4810,1475 h50 r90; Top Overlay "1" at 4810,795 h50 r90; Top Overlay "2" at 4710,795 h50 r90
P5: Top Overlay "1" at 735,2960 h50 r90; Top Overlay "2" at 635,2940 h50 r90; Top Overlay "4" at 635,3200 h50 r90; Top Overlay "3" at 735,3200 h50 r90